# Altium PCB Nixie Valve Clock Power Supply Daughterboard.PcbDoc (part 2 of 2)
Units mm, origin at the board's own origin, x right, y up, seen from the top; angles counter-clockwise.
Board outline 55 x 51 mm, 2 copper layers (Top Layer, Bottom Layer), stack 1.57 mm thick; 45 components, 21 nets, 192 pads, 92 vias.
Unrouted connection lines stored in the file: 89.
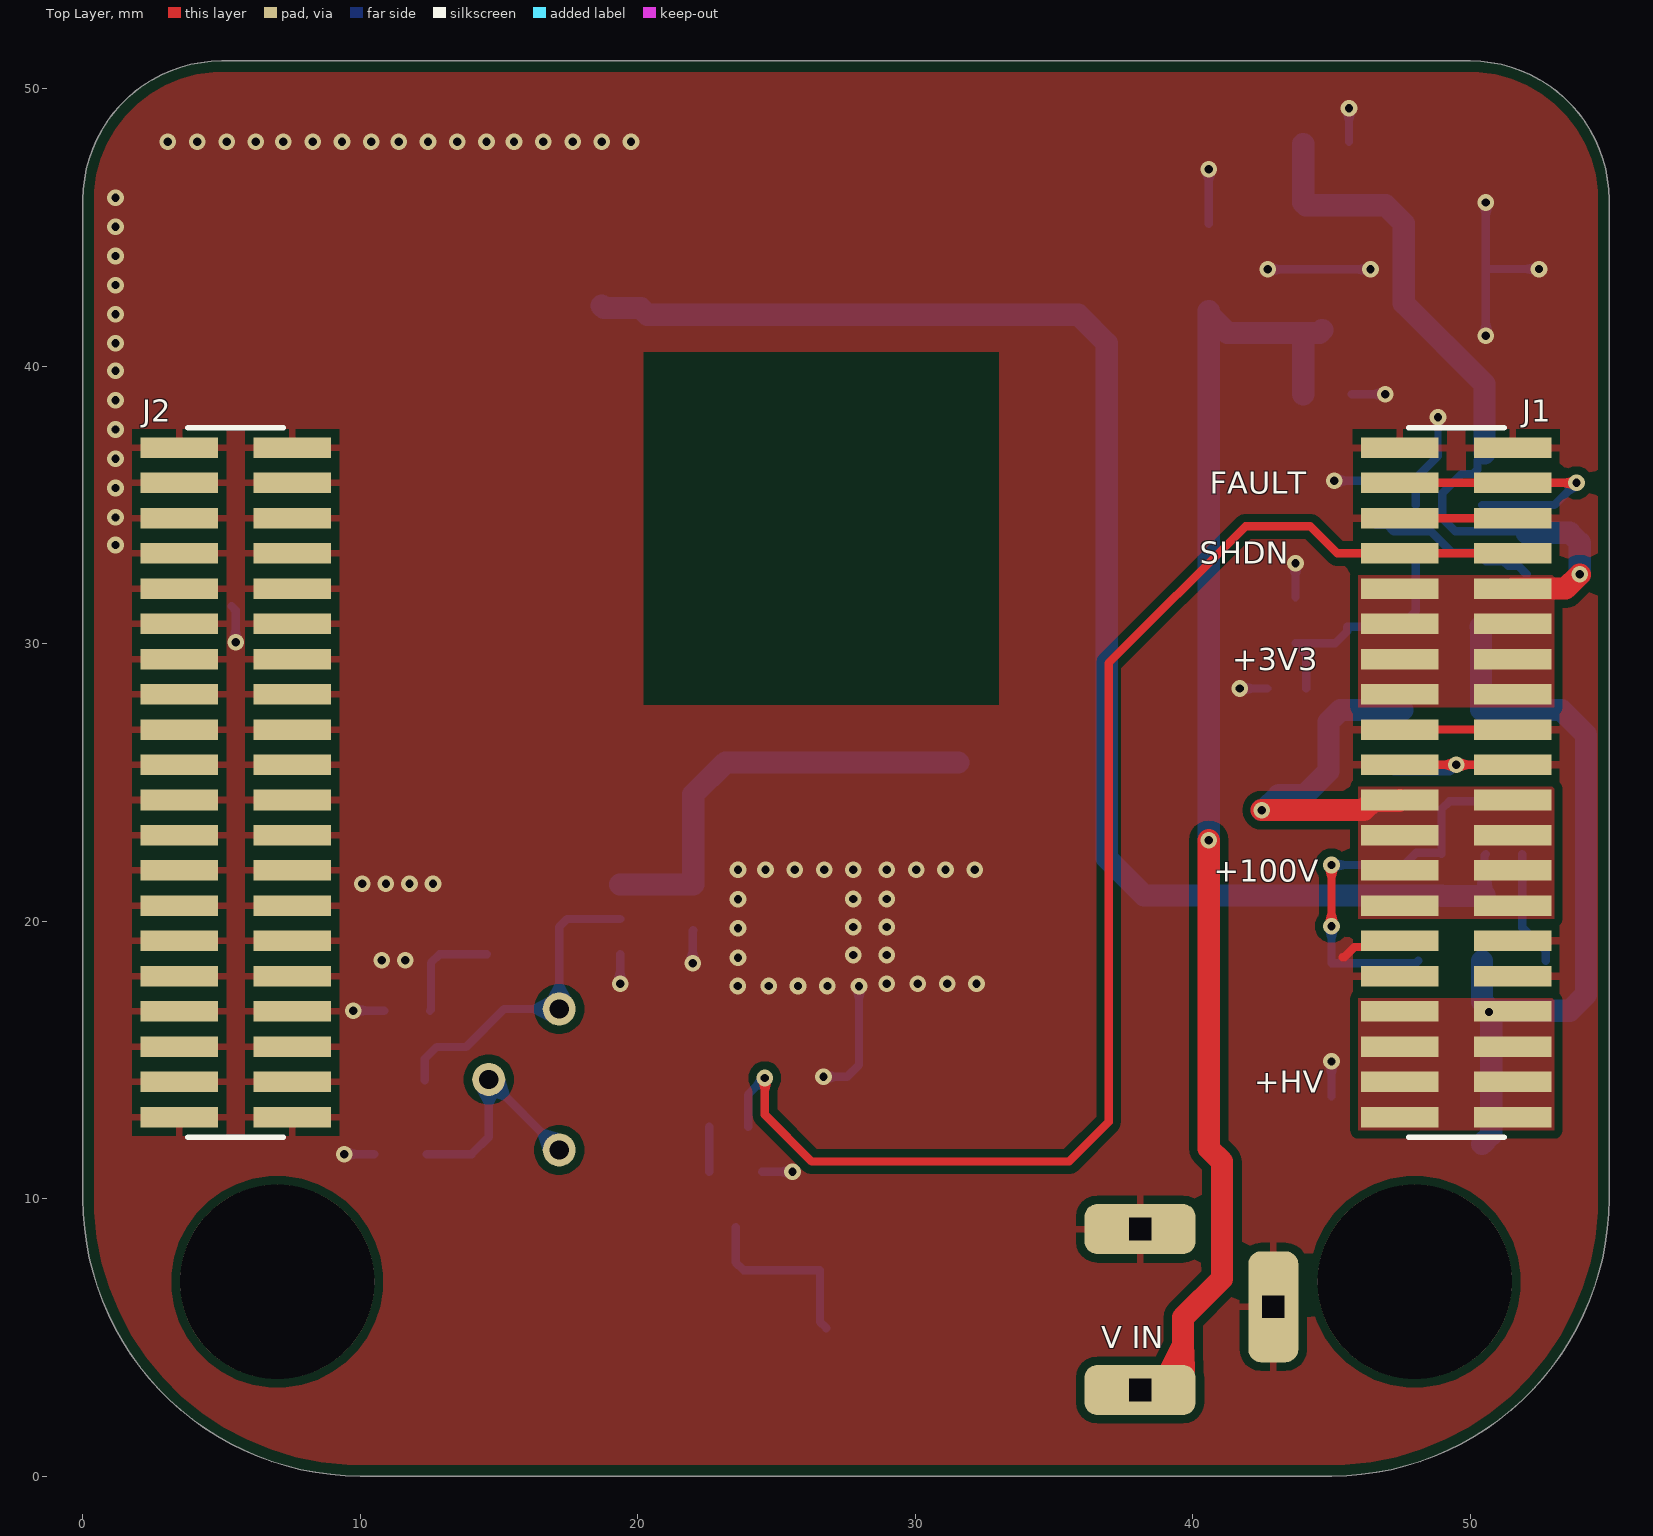
[diagram p0: Top Layer view]

## Polygon pours and split planes (outlines as drawn) (continued)
+100V on Top Layer "NONET_L-01_P-001" (solid, pour order 18): 53.031,20.084 53.03,20.083 45.968,20.083 45.968,24.836 45.968,24.837 53.031,24.837
+HV on Top Layer "NONET_L-01_P-001" (solid, pour order 19): 53.032,12.465 53.031,12.464 45.969,12.464 45.969,17.218 53.032,17.218
GND on Top Layer "GND_TOP" (solid, remove dead copper, pour order 20): 10,0 45,0 ccw(c45,10) 55,10 55,46 ccw(c50,46) 50,51 5,51 ccw(c5,46) 0,46 0,10 ccw(c10,10)

## Other copper
Top Layer:
  pour cut-out: 20.213,27.806 20.213,40.506 33.013,40.506 33.013,27.806
Bottom Layer:
  pour cut-out: 20.363,27.806 20.363,40.506 32.863,40.506 32.863,27.806

## Silkscreen, mask and mechanical layers (free items; w line width, h text height)
Top Overlay:
  text "FAULT" at 40.618,35.395 h0.8
  text "SHDN" at 40.25,32.873 h0.8
  text "+3V3" at 41.418,29.045 h0.8
  text "+100V" at 40.751,21.425 h0.8
  text "+HV" at 42.217,13.805 h0.8
  text "V IN" at 36.7,4.608 h0.8
Bottom Overlay:
  drawing of 2 lines, arcs and shapes, not listed
  text "+3V3" at 46.454,49.059 h0.8
  text "WARNING: / HIGH VOLTAGE" at 31.84,41.061 h0.8
  text "+HV" at 10.956,39.799 h0.8
  text "+100V" at 47.097,22.4 h0.8
  text "POWER" at 40.465,17.061 h1.52
  text "HV / ADJ" at 18.349,7.052 h1
Mechanical 1:
  lines w0.254: 0,10 ccw(c10,10) 10,0 45,0 ccw(c45,10) 55,10 55,46 ccw(c50,46) 50,51 5,51 ccw(c5,46) 0,46 0,10
  lines w0.381: 58.239,23.352 68.651,23.352 102.423,23.352 119.183,23.352 135.689,23.352 150.163,23.352 ; 58.239,26.4 68.651,26.4 102.423,26.4 119.183,26.4 135.689,26.4 150.163,26.4 ; 58.239,29.448 68.651,29.448 102.423,29.448 119.183,29.448 135.689,29.448 150.163,29.448 ; 58.239,32.496 68.651,32.496 102.423,32.496 119.183,32.496 135.689,32.496 150.163,32.496 ; 58.239,35.544 68.651,35.544 102.423,35.544 119.183,35.544 135.689,35.544 150.163,35.544 ; 58.239,38.592 68.651,38.592 102.423,38.592 119.183,38.592 135.689,38.592 150.163,38.592 ; 58.239,41.64 68.651,41.64 102.423,41.64 119.183,41.64 135.689,41.64 150.163,41.64 ; 58.239,44.688 68.651,44.688 102.423,44.688 119.183,44.688 135.689,44.688 150.163,44.688 ; 58.239,47.736 150.163,47.736 ; 68.651,50.784 68.651,20.304 ; 102.423,50.784 102.423,20.304 ; 119.183,50.784 119.183,20.304 ; 135.689,50.784 135.689,20.304 ; 68.651,20.304 58.239,20.304 58.239,50.784 150.163,50.784 150.163,20.304 135.689,20.304 ; 68.651,20.304 102.423,20.304 ; 102.423,20.304 119.183,20.304 ; 119.183,20.304 135.689,20.304
  text "Layer" at 60.017,48.498 h1.52
  text "Name" at 70.429,48.498 h1.52
  text "Material" at 104.201,48.498 h1.52
  text "Thickness" at 120.961,48.498 h1.52
  text "Constant" at 137.467,48.498 h1.52
  text "Top Overlay" at 70.429,45.45 h1.52
  text "Top Solder" at 70.429,42.402 h1.52
  text "SM-001" at 104.201,42.402 h1.52
  text "0.010mm" at 120.961,42.402 h1.52
  text "4" at 137.467,42.402 h1.52
  text "Top Surface Finish" at 70.429,39.354 h1.52
  text "Lead-Free" at 104.201,39.354 h1.52
  text "0.020mm" at 120.961,39.354 h1.52
  text "1" at 60.017,36.306 h1.52
  text "Top Layer" at 70.429,36.306 h1.52
  text "CF-004" at 104.201,36.306 h1.52
  text "0.035mm" at 120.961,36.306 h1.52
  text "Dielectric 1" at 70.429,33.258 h1.52
  text "Core-043" at 104.201,33.258 h1.52
  text "1.500mm" at 120.961,33.258 h1.52
  text "4.3" at 137.467,33.258 h1.52
  text "2" at 60.017,30.21 h1.52
  text "Bottom Layer" at 70.429,30.21 h1.52
  text "CF-004" at 104.201,30.21 h1.52
  text "0.035mm" at 120.961,30.21 h1.52
  text "Bottom Surface Finish" at 70.429,27.162 h1.52
  text "Lead-Free" at 104.201,27.162 h1.52
  text "0.020mm" at 120.961,27.162 h1.52
  text "Bottom Solder" at 70.429,24.114 h1.52
  text "SM-001" at 104.201,24.114 h1.52
  text "0.010mm" at 120.961,24.114 h1.52
  text "4" at 137.467,24.114 h1.52
  text "Bottom Overlay" at 70.429,21.066 h1.52
Drill Drawing:
  circle w0.254: c2.556,64.542 r0.847
  lines w0.254: 1.709,67.505 2.556,67.928 3.403,67.505 2.979,68.352 3.403,69.198 2.556,68.775 1.709,69.198 2.133,68.352 1.709,67.505 ; 1.709,71.738 2.133,71.738 2.556,71.315 2.979,71.738 3.403,71.738 2.979,72.162 3.403,72.585 2.979,72.585 2.556,73.008 2.133,72.585 1.709,72.585 2.133,72.162 1.709,71.738 ; 1.709,76.818 3.403,76.818 2.556,75.125 1.709,76.818
  lines w0.381: 0.191,62.552 201.455,62.552 ; 0.191,77.792 201.455,77.792 ; 14.183,58.742 14.183,81.602 ; 29.165,58.742 29.165,81.602 ; 58.62,58.742 58.62,81.602 ; 71.469,58.742 71.469,81.602 ; 90.108,58.742 90.108,81.602 ; 128.197,58.742 128.197,81.602 ; 143.179,58.742 143.179,81.602 ; 170.857,58.742 170.857,81.602 ; 0.191,58.742 201.455,58.742 201.455,81.602 0.191,81.602 0.191,58.742
  text "Symbol" at 2.476,78.935 h1.83
  text "Count" at 15.326,78.935 h1.83
  text "Hole Size" at 30.308,78.935 h1.83
  text "Plated" at 59.763,78.935 h1.83
  text "Hole Type" at 72.612,78.935 h1.83
  text "Drill Layer Pair" at 91.251,78.935 h1.83
  text "Via/Pad" at 129.34,78.935 h1.83
  text "Pad Shape" at 144.322,78.935 h1.83
  text "Template" at 172,78.935 h1.83
  text "2" at 15.326,75.125 h1.52
  text "7.000mm (275.59mil)" at 30.308,75.125 h1.52
  text "NPTH" at 59.763,75.125 h1.52
  text "Round" at 72.612,75.125 h1.52
  text "Top Layer - Bottom Layer" at 91.251,75.125 h1.52
  text "Pad" at 129.34,75.125 h1.52
  text "Rounded" at 144.322,75.125 h1.52
  text "c700hn700" at 172,75.125 h1.52
  text "3" at 15.326,71.315 h1.52
  text "0.690mm (27.17mil)" at 30.308,71.315 h1.52
  text "PTH" at 59.763,71.315 h1.52
  text "Round" at 72.612,71.315 h1.52
  text "Top Layer - Bottom Layer" at 91.251,71.315 h1.52
  text "Pad" at 129.34,71.315 h1.52
  text "Rounded" at 144.322,71.315 h1.52
  text "c119h69" at 172,71.315 h1.52
  text "3" at 15.326,67.505 h1.52
  text "0.800mm (31.50mil)" at 30.308,67.505 h1.52
  text "PTH" at 59.763,67.505 h1.52
  text "Rectangle" at 72.612,67.505 h1.52
  text "Top Layer - Bottom Layer" at 91.251,67.505 h1.52
  text "Pad" at 129.34,67.505 h1.52
  text "Rounded Rectangle" at 144.322,67.505 h1.52
  text "r400_180h80_300r45" at 172,67.505 h1.52
  text "92" at 15.326,63.695 h1.52
  text "0.300mm (11.81mil)" at 30.308,63.695 h1.52
  text "PTH" at 59.763,63.695 h1.52
  text "Round" at 72.612,63.695 h1.52
  text "Top Layer - Bottom Layer" at 91.251,63.695 h1.52
  text "Via" at 129.34,63.695 h1.52
  text "Rounded" at 144.322,63.695 h1.52
  text "v60h30" at 172,63.695 h1.52
  text "100 Total" at 15.326,59.885 h1.52
  text "Slot definitions :" at 2.476,56.203 h1.52
  text "Routed Path Length" at 28.707,56.203 h1.52
  text "= Calculated from tool start centre position to tool end centre position." at 56.715,56.203 h1.52
  text "Hole Length" at 28.707,53.663 h1.52
  text "= Routed Path Length + Tool Size = Slot length as defined in the PCB layout" at 46.304,53.663 h1.52